# Altium PCB PCB1.PcbDoc
Units mm, origin at the board's own origin, x right, y up, seen from the top; angles counter-clockwise.
Board outline 93 x 70.5 mm, 2 copper layers (Top Layer, Bottom Layer); 18 components, 21 nets, 78 pads, 0 vias.
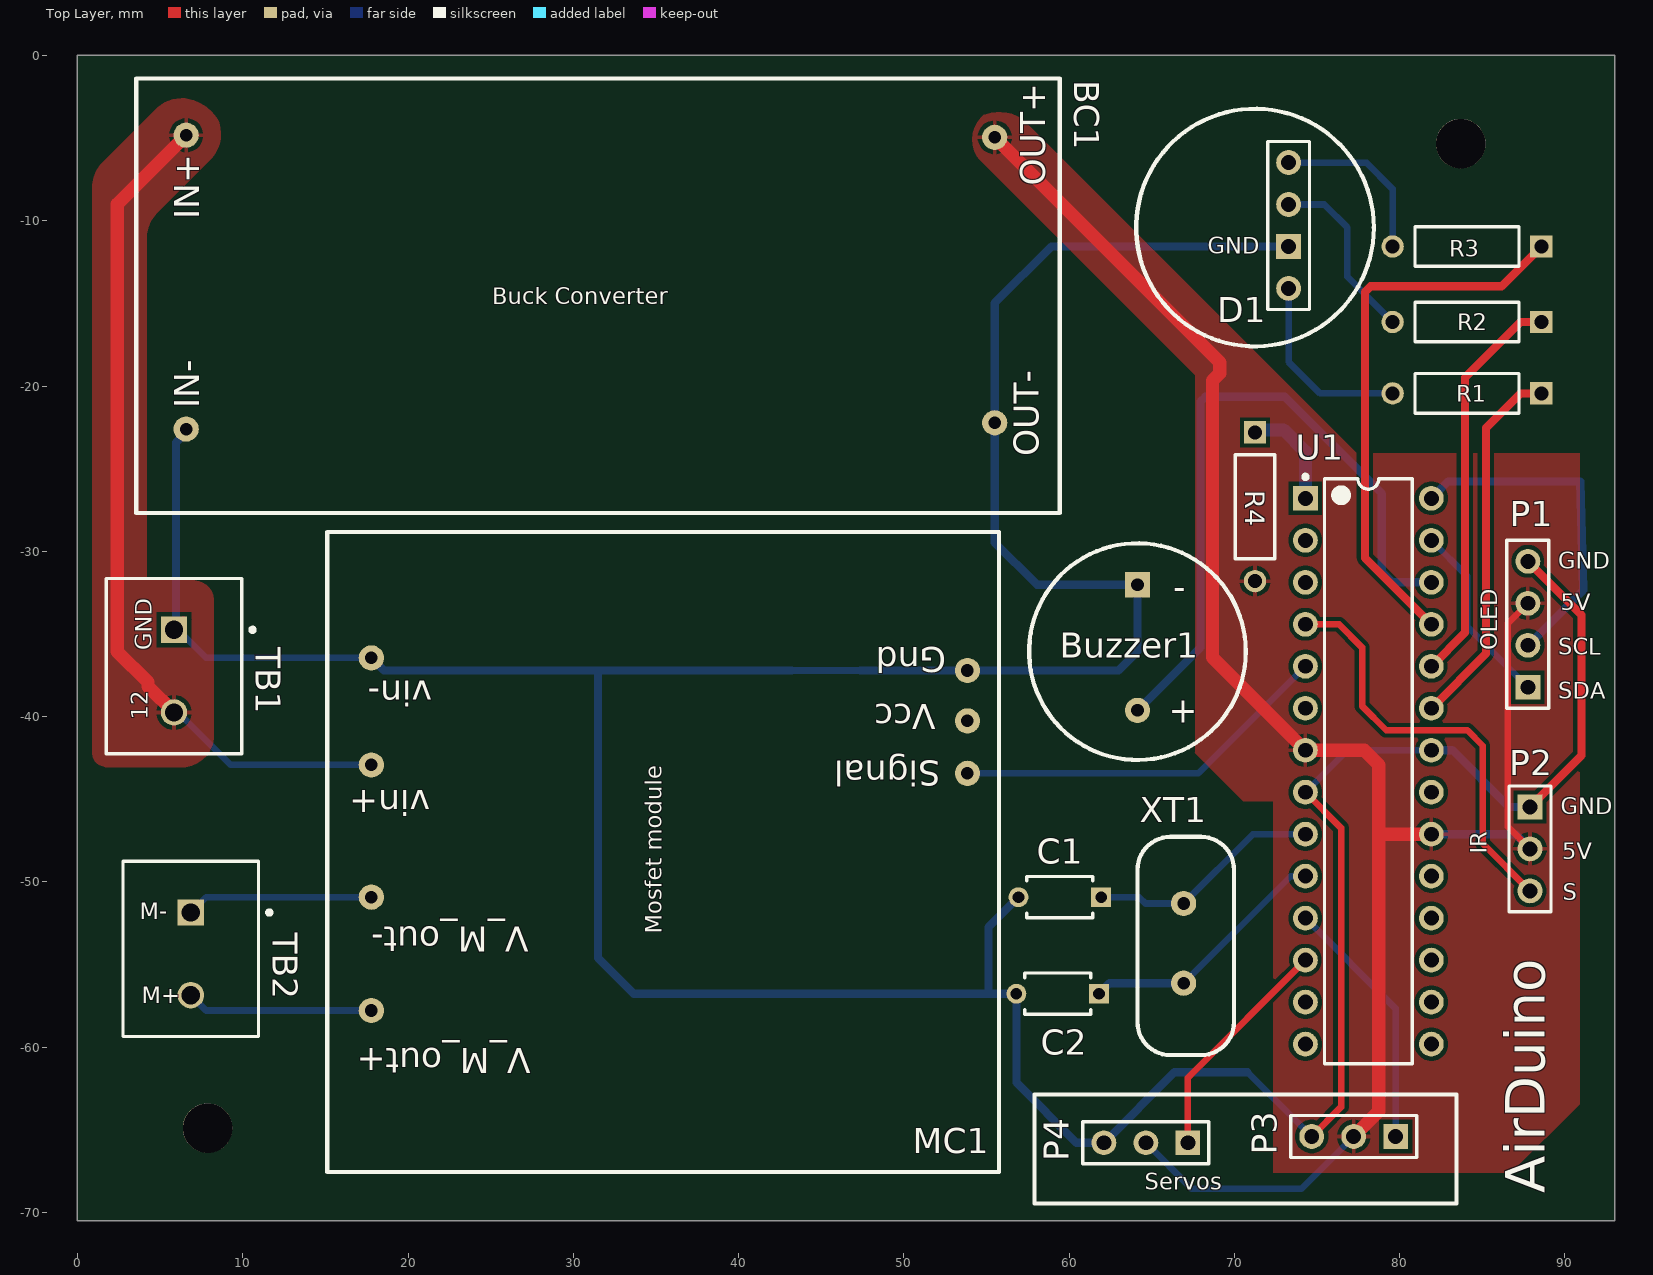
[diagram p0: Top Layer view]
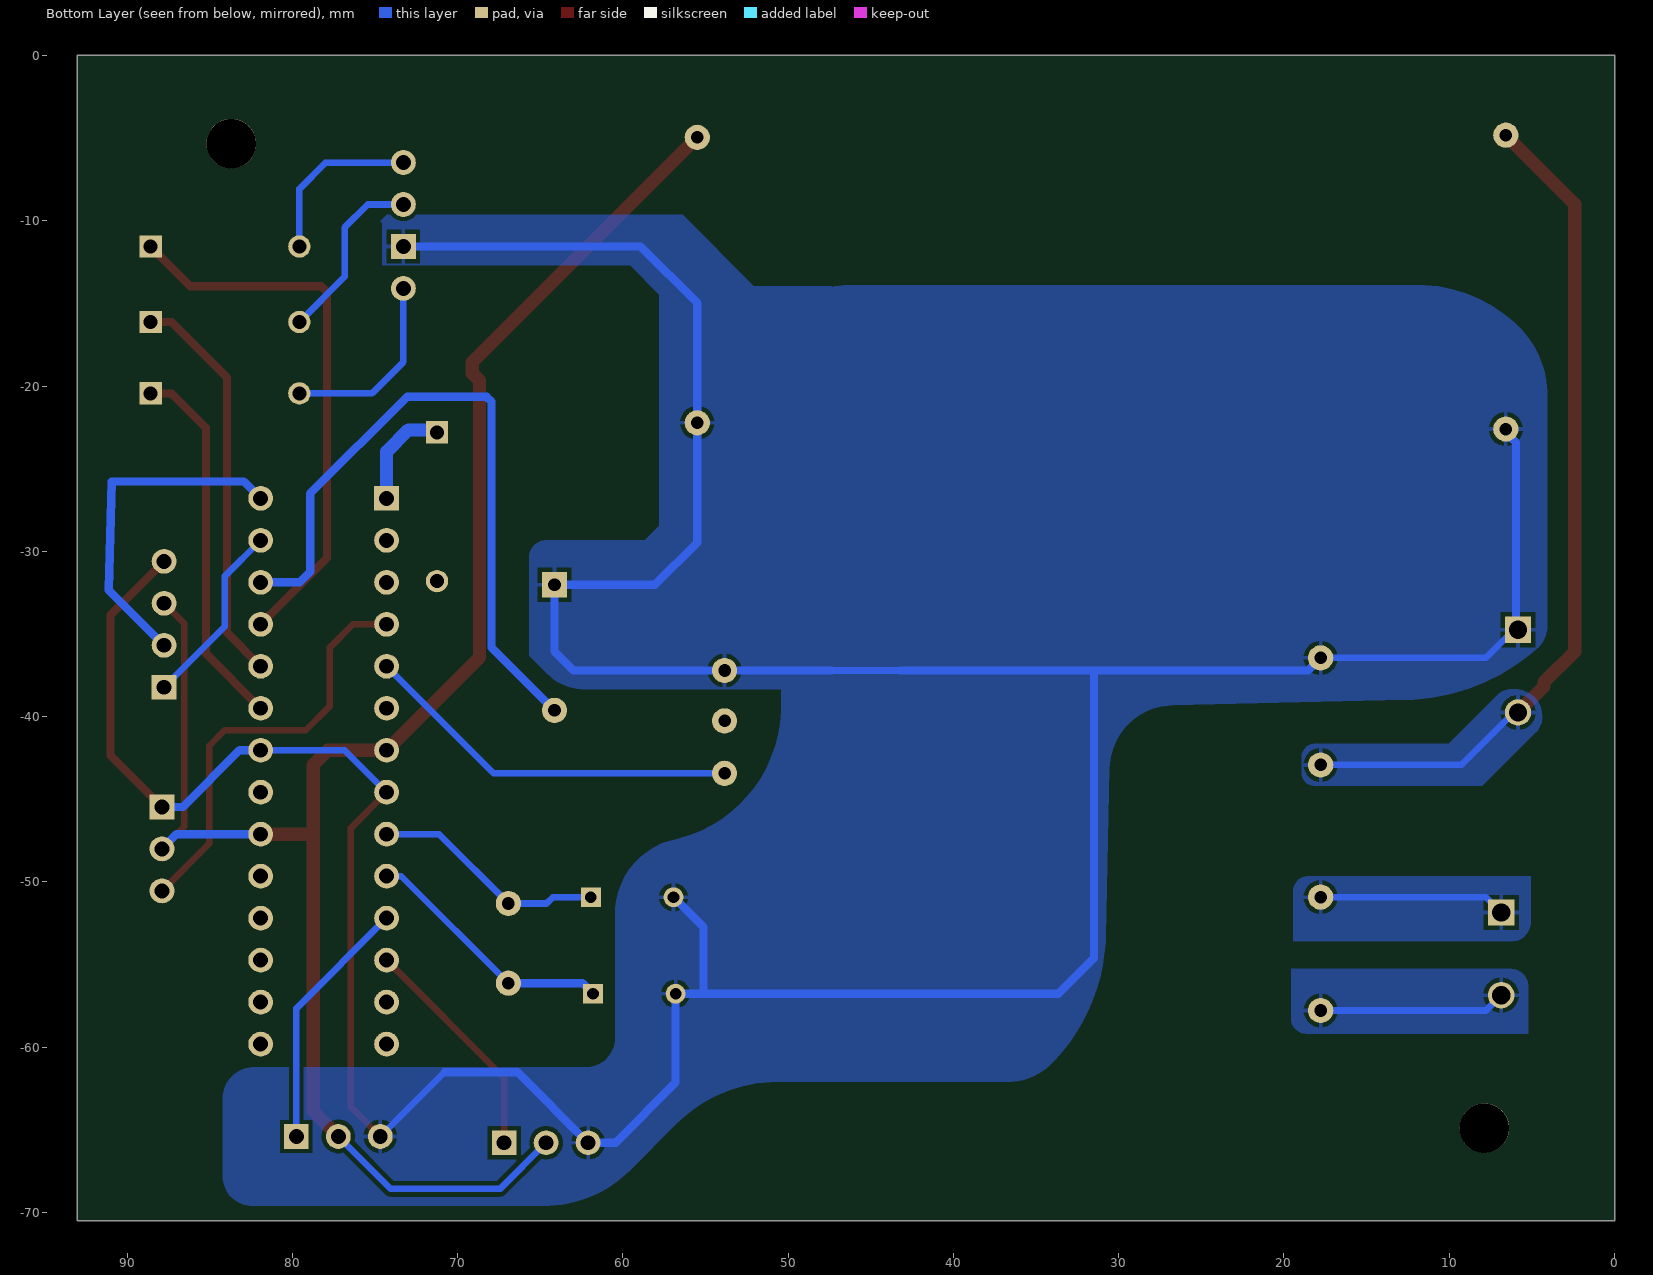
[diagram p1: Bottom Layer view, seen from below]
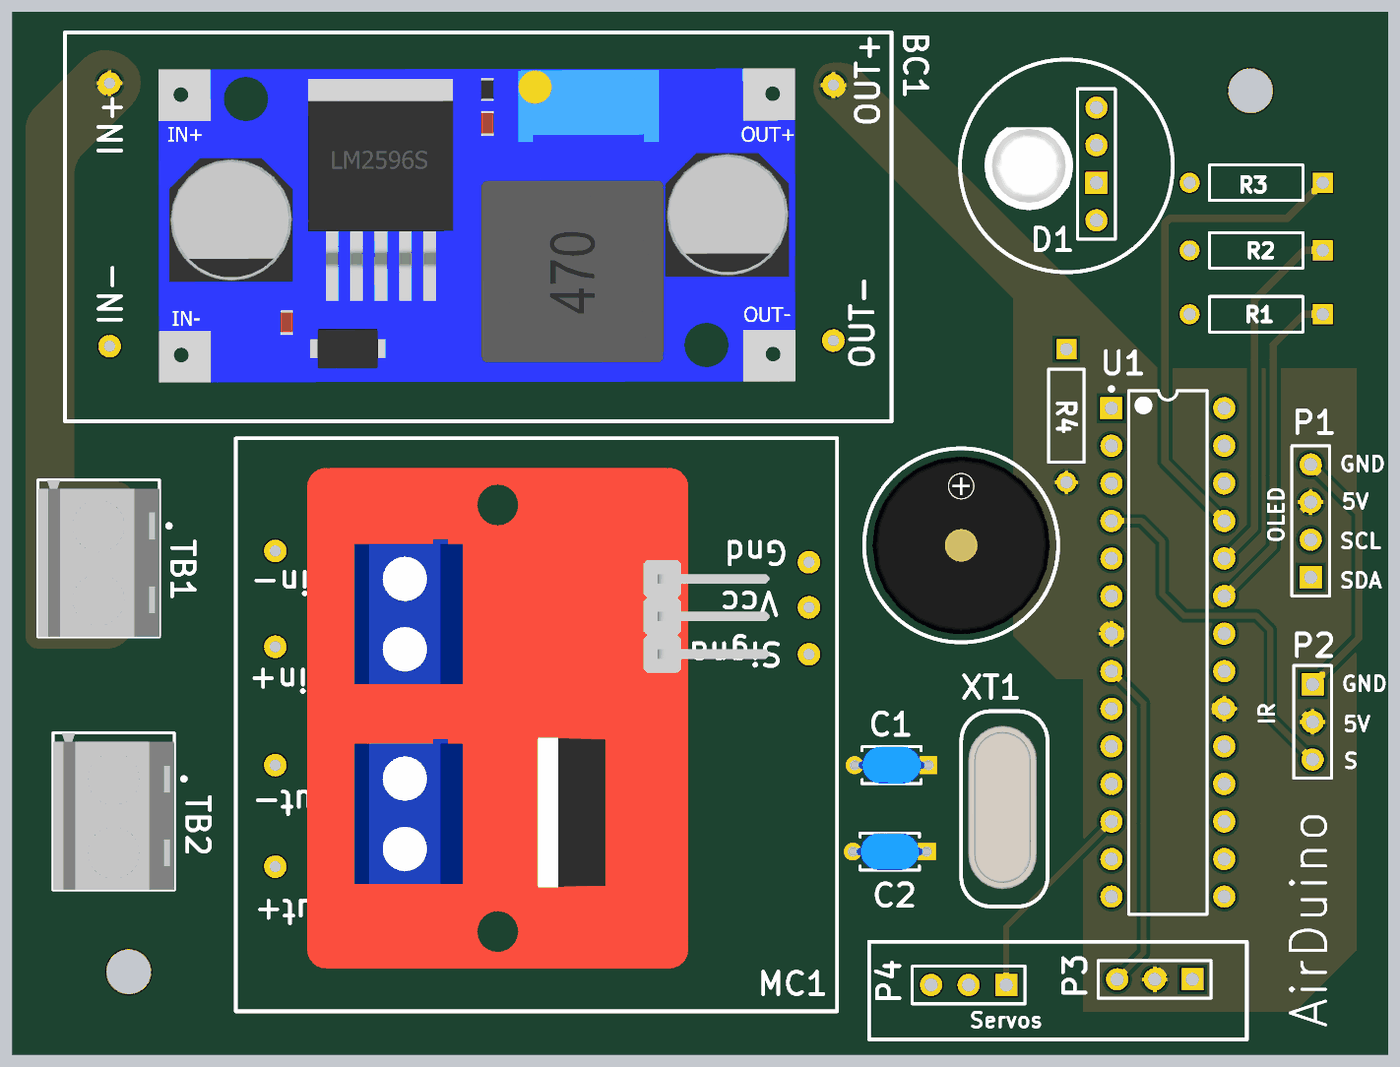
[diagram p2: 3D render of the assembled board from above, using the file's embedded part models]

## Layer stack, top to bottom
Top Solder: solder mask 0.0102, Solder Resist, Dk 3.5
Top Layer: signal copper 0.0356
Dielectric 1: dielectric 0.32, FR-4, Dk 4.8
Bottom Layer: signal copper 0.0356
Bottom Solder: solder mask 0.0102, Solder Resist, Dk 3.5

## Board outline
0,-70.5 93,-70.5 93,0 0,0

## Design rules (kind name [scope] priority, off if disabled: settings)
Clearance [All] p1: gap=0.254 ignorepadtopadclearanceinfootprint=FALSE except(0: Arc-Hole Track-Hole SMDPad-Hole THPad-Hole Via-Hole Fill-Hole Poly-Hole Region-Hole Text-Hole)
HoleSize [All] p1: absolutevalues=TRUE maxlimit=4 minlimit=0.4 maxpercent=80.000 minpercent=20.000
HoleToHoleClearance [All] p1: gap=0.3 allowstackedmicrovias=TRUE
PolygonConnect [All] p1: connectstyle=Relief reliefconductorwidth=0.254 reliefentries=4 polygonreliefangle="90 Angle" airgapwidth=0.254
RoutingVias [All] p1: holewidth=0.711 width=1.27 viastyle="Through Hole" minholewidth=0.711 minwidth=1.27 maxholewidth=0.711 maxwidth=1.27
SolderMaskExpansion [All] p1: expansion=0.102 istentingtop=FALSE
Width OtherWidths [All] p1: maxlimit=1.27 minlimit=0.254 preferedwidth=0.5
Width PowerNets [(InNet('5V') OR InNet('GND') OR InNet('12V'))] p2: maxlimit=0.762 minlimit=0.254 preferedwidth=0.6
Width [All] p3: maxlimit=0.254 minlimit=0.254 preferedwidth=0.254
28 further rules are at their usual default settings.

## Components (designator, comment, footprint, x,y, rotation, side; value= is the part's Value field where it differs from the comment)
BC1 "BuckConverter 5V" BUCK 27.686,-15.367 r0 top
Buzzer1 "Buzzer" BUZZER 64.135,-39.624 r0 top
C1 "22pF" FP-RDE0M1-MFG 59.436,-50.927 r180 top
C2 "22pF" FP-RDE0M1-MFG 59.309,-56.769 r180 top
D1 "check foot print and real model" RGB_LED 67.437,-10.922 r180 top
MC1 "MosfetModule" MOSFETMOTERDRIVER 49.657,-33.782 r180 top
P1 "OLED" HDR1X4 87.757,-38.227 r90 top
P2 "IR_Reciever" HDR1X3 87.884,-45.466 r270 top
P3 "Servo1" HDR1X3 79.756,-65.405 r180 top
P4 "Servo2" HDR1X3 67.183,-65.786 r180 top
R1 "MFR-25FBF52-1K" RESA60-630X240 84.074,-20.447 r180 top
R2 "MFR-25FBF52-1K" RESA60-630X240 84.074,-16.129 r180 top
R3 "MFR-25FBF52-1K" RESA60-630X240 84.074,-11.557 r180 top
R4 "10K" RESA60-630X240 71.247,-27.305 r270 top
TB1 "DC 12 IN" "TERMINAL BLOCK" 5.842,-37.251 r270 top
TB2 "Motor" "TERMINAL BLOCK" 6.858,-54.356 r270 top
U1 "ATmega328-PU" 28P3 78.105,-43.307 r0 top
XT1 "Crystal Oscillator" CRYSTALOSCILLATOR 67.31,-51.562 r90 top

## Footprints (in the part's own frame and the unit in brackets; to place one, negate y for a bottom-side part, rotate by r counter-clockwise, add the part's x,y. Pads: shape width x height; smd on the part's side, far side on the other; paste and mask are expansions set on the pad)
28P3 [mm] "28-Pin Plastic Dual In-Line Package (PDIP)"
  rect 1.5x1.5 hole 0.9: 1(-3.81,16.51)
  round 1.5 hole 0.9: 2(-3.81,13.97) 3(-3.81,11.43) 4(-3.81,8.89) 5(-3.81,6.35) 6(-3.81,3.81) 7(-3.81,1.27) 8(-3.81,-1.27) 9(-3.81,-3.81) 10(-3.81,-6.35) 11(-3.81,-8.89) 12(-3.81,-11.43) 13(-3.81,-13.97) 14(-3.81,-16.51) 15(3.81,-16.51) 16(3.81,-13.97) 17(3.81,-11.43) 18(3.81,-8.89) 19(3.81,-6.35) 20(3.81,-3.81) 21(3.81,-1.27) 22(3.81,1.27) 23(3.81,3.81) 24(3.81,6.35) 25(3.81,8.89) 26(3.81,11.43) 27(3.81,13.97) 28(3.81,16.51)
  silkscreen extent -3.93,-17.7 2.65,17.93, body extent -3.6,-17.65 3.6,17.65, height 4.58
BUCK [mil]
  round 60 hole 30: 0(-830.98,415) 1(-830.98,-285) 2(1095,410) 3(1095,-270)
  silkscreen extent -950,-485 1250,550, body extent -701,-381 994,454, height 513
BUZZER [mil]
  round 60 hole 30: 0(0,0)
  rect 60x60 hole 30: 1(0,299.21)
  silkscreen extent -258,-118 258,398, body extent -236,-96 236,376, height 374
CRYSTALOSCILLATOR [mil]
  round 60 hole 30: 0(-180,15) 1(10,15)
  silkscreen extent -351,-105 169,125, body extent -305,-77 130,107, height 138
FP-RDE0M1-MFG [mm]
  rect 1.2x1.2 hole 0.7 paste-1000 mask+0: 1(-2.5,0)
  round 1.2 hole 0.7 paste-1000 mask+0: 2(2.5,0)
  silkscreen extent -2,-1.25 2,1.25, body extent -3.2,-1.35 3.2,1.35, height 0.25
HDR1X3 [mm] "Connector; Header; 3 Position"
  rect 1.5x1.5 hole 0.9: 1(0,0)
  round 1.5 hole 0.9: 2(2.54,0) 3(5.08,0)
  silkscreen extent -1.27,-1.27 6.35,1.27
HDR1X4 [mm] "Connector; Header; 4 Position"
  rect 1.5x1.5 hole 0.9: 1(0,0)
  round 1.5 hole 0.9: 2(2.54,0) 3(5.08,0) 4(7.62,0)
  silkscreen extent -1.27,-1.27 8.89,1.27
MOSFETMOTERDRIVER [mil]
  round 60 hole 30: 4(1255,945) 5(1255,675) 6(1255,360) 7(1255,105) 8(-165,380) 9(-165,135) 10(-165,255)
  silkscreen extent -240,-195 1360,1330, body extent -60,-116 1170,1216, height 972
RESA60-630X240 [mm] "Axial Resistor, 2-Leads, Dia 2.4mm, Body Length 6.3mm"
  rect 1.35x1.35 hole 0.85: 1(-4.5,0)
  round 1.35 hole 0.85: 2(4.5,0)
  silkscreen extent -3.15,-1.2 3.15,1.2, body extent -3.15,-1.2 3.15,1.2, height 2.4
RGB_LED [mm]
  rect 1.5x1.5 hole 0.9: 0(-5.842,0.635)
  round 1.5 hole 0.9: 1(-5.842,3.175) 2(-5.842,-1.905) 3(-5.842,-4.445)
  silkscreen extent -11,-7.7 3.38,6.68, body extent -4.27,-3.11 1.73,2.49, height 7.99
"TERMINAL BLOCK" [mm] "Female Header, Pitch 5mm, 1 x 2 Position, Height 10mm"
  rect 1.6x1.6 hole 1.1: 1(-2.5,0)
  round 1.6 hole 1.1: 2(2.5,0)
  silkscreen extent -5.6,-4.1 5,4.88, body extent -5.6,-4.1 5,4.1, height 10

## Part data
BC1: library part BuckConverter
C1 C2: library part CMP-06035-051680-1, "Ceramic Capacitor 100nF ±10% 50V X7R Radial", Capacitance=100nF, Case/Package=Radial, Dielectric=X7R, Max Operating Temperature=125°C, Min Operating Temperature=-55°C, Package Quantity=2000, Resistor Type=Ceramic, Tolerance=10%, Voltage Rating=50V, Height=3.5mm, Height - Seated (Max)=0.236inch, Lead Diameter=0.5mm, Lead Free="Lead Free", Lead Pitch=0.197inch, Lead/Base Style=Kinked, Length=0.157inch, Mount="Through Hole", Packaging="Tape and Reel", Termination=Radial, Voltage Rating (DC)=50V, Width=3.5mm
D1: library part RGB_LED
P1: library part "Header 4", "Header, 4-Pin", LatestRevisionDate=17-Jul-2002, LatestRevisionNote="Re-released for DXP Platform.", Publisher="Altium Limited"
P2 P3 P4: library part "Header 3", "Header, 3-Pin", LatestRevisionDate=17-Jul-2002, LatestRevisionNote="Re-released for DXP Platform.", Publisher="Altium Limited"
R1 R2 R3 R4: library part CMP-1659-00075-1, "Axial Resistor, 1 KOhm, +/- 1%, 250 mW, -55 to 155 degC, 2-Pin THD, RoHS, Bulk", Case\Package=Axial, Max Operating Temperature="155 degC", Min Operating Temperature="-55 degC", Package Quantity=200, Power Rating="250 mW", Resistance="10 kohm", Tolerance=1%, Voltage Rating="250 V", ComponentLink1Description="Manufacturer URL", ComponentLink1URL=http://www.yageo.com/, ComponentLink2Description=Datasheet, ComponentLink2URL=http://www.yageo.com/documents/recent/Yageo%20LR_MFR_2013.pdf, DatasheetVersion=Apr-13, Length="0.248 inch", PackageDescription="2-Pin Axial Lead, Dia 2.4 mm, Body Length 6.3 mm", PackageReference=MFR-25, Packaging=Bulk, RoHSCompliant=true
TB1 TB2: library part "Terminal Block"
U1: library part CMP-0095-00015-2, "8-bit AVR Microcontroller, 32KB Flash, 1KB EEPROM, 2KB SRAM, 28-pin PDIP, Industrial Grade (-40°C to 85°C)", ComponentLink1Description="Manufacturer URL", ComponentLink1URL=http://www.atmel.com/, ComponentLink2Description="ATmega48A/48PA/88A/88PA/168A/168PA/328/328P Datasheet", ComponentLink2URL=http://www.atmel.com/dyn/resources/prod_documents/8271.pdf, ComponentLink3Description="ATmega48A/48PA/88A/88PA/168A/168PA/328/328P Summary", ComponentLink3URL=http://www.atmel.com/dyn/resources/prod_documents/8271S.pdf, DatasheetVersion="revD, May-2011", PackageDescription="28-lead (0.300\"/7.62mm Wide) Plastic Dual Inline Package (PDIP)", PackageReference=28P3, PackageVersion="revB, Sep-2001", RevisionNote="DatasheetVersion updated. URLs added."

## Free pads (board coordinates)
  round 3 hole 3: 2(7.874,-64.897) 2(83.693,-5.334)

## Nets (pads, with @x,y where several pads share a name; then routed paths per layer and width w, separated by ;. In a path a pad name is that pad's centre, name@x,y a point inside that pad or via, vN(x,y) a via of type N, cw(c..) or ccw(c..) an arc to the next point about the centre after c; other vN are vias at no path point)
5V: BC1.2 P1.3 P2.2 P3.2 P4.2 R4.2 U1.7 U1.20 | length 113.7
  Top Layer w0.4: P1.3 86.538,-34.366 86.538,-46.66 P2.2
  Top Layer w0.8: BC1.2 69.116,-18.57 69.116,-19.232 68.673,-19.675 68.673,-36.415 U1.7 77.851,-42.037 78.74,-42.926 78.74,-46.99 ; P3.2 78.74,-63.881 78.74,-46.99 ; U1.20 78.867,-47.117 78.74,-46.99
  Bottom Layer w0.4: P4.2 67.437,-68.58 74.041,-68.58 P3.2
  Bottom Layer w0.5: U1.20 86.995,-47.117 P2.2
12V: BC1.0 MC1.6 TB1.2 | length 51.3
  Top Layer w0.8: TB1.2 4.272,-38.181 4.272,-37.927 2.413,-36.068 2.413,-8.992 BC1.0
  Bottom Layer w0.4: TB1.2 6.096,-39.751 9.271,-42.926 MC1.6
GND: BC1.1 BC1.3 Buzzer1.1 C1.2 C2.2 D1.0 MC1.7 MC1.9 P1.4 P2.1 P3.3 P4.3 TB1.1 U1.8 U1.22 | length 254.8
  Top Layer w0.4: TB1.1 TB1.1@6.442,-34.151 ; U1.8 76.454,-46.736 76.454,-63.627 P3.3
  Top Layer w0.5: P1.4 91,-33.85 91,-42.35 P2.1
  Bottom Layer w0.4: TB1.1@5.969,-34.624 7.794,-36.449 MC1.7 ; 43.22,-37.211 47.371,-37.211 ; 70.79,-61.519 P3.3 ; U1.8 76.835,-42.037 U1.22
  Bottom Layer w0.5: TB1.1 5.969,-34.624 5.969,-23.411 6.579,-22.801 BC1.1 ; MC1.7 18.542,-37.211 31.496,-37.211 ; 43.22,-37.211 31.496,-37.211 ; 47.371,-37.211 MC1.9 62.992,-37.211 64.135,-36.068 Buzzer1.1 58.059,-32.024 55.499,-29.464 BC1.3 55.499,-14.986 58.928,-11.557 D1.0 ; C1.2 55.118,-52.745 55.118,-56.769 ; 70.79,-61.519 66.37,-61.519 P4.3 60.452,-65.786 56.809,-62.143 C2.2 55.118,-56.769 ; U1.22 83.185,-42.037 86.614,-45.466 P2.1 ; 31.496,-37.211 31.496,-54.61 33.655,-56.769 55.118,-56.769
IR_signal: P2.3 U1.4 | length 25.8
  Top Layer w0.4: U1.4 76.327,-34.417 77.724,-35.814 77.724,-39.37 79.187,-40.833 84.097,-40.833 85.027,-41.763 85.027,-47.689 P2.3
Motor: MC1.8 U1.5 | length 23.1
  Bottom Layer w0.4: MC1.8 67.818,-43.434 U1.5
NetBuzzer1_0: Buzzer1.0 U1.26 | length 41.8
  Bottom Layer w0.5: Buzzer1.0 67.945,-35.814 67.945,-20.943 68.238,-20.65 73.05,-20.65 78.918,-26.518 78.918,-31.242 79.553,-31.877 U1.26
NetC1_1: C1.1 U1.9 XT1.1 | length 14.3
  Bottom Layer w0.4: C1.1 64.237,-50.927 64.618,-51.308 XT1.1 71.12,-47.117 U1.9
NetC2_1: C2.1 U1.10 XT1.0 | length 15.4
  Bottom Layer w0.4: XT1.0 73.406,-49.657 U1.10
  Bottom Layer w0.5: C2.1 62.444,-56.134 XT1.0
NetD1_1: D1.1 R1.2 | length 11.5
  Bottom Layer w0.4: D1.1 73.279,-18.542 75.184,-20.447 R1.2
NetD1_2: D1.2 R2.2 | length 11
  Bottom Layer w0.4: D1.2 75.438,-9.017 76.835,-10.414 76.835,-13.39 R2.2
NetD1_3: D1.3 R3.2 | length 10.4
  Bottom Layer w0.4: D1.3 73.29,-6.488 77.989,-6.488 79.574,-8.073 R3.2
NetMC1_4: MC1.4 TB2.2 | length 11.3
  Bottom Layer w0.4: TB2.2 7.787,-57.785 MC1.4
NetMC1_5: MC1.5 TB2.1 | length 11.3
  Bottom Layer w0.4: TB2.1 7.787,-50.927 MC1.5
NetR1_1: R1.1 U1.23 | length 22.6
  Top Layer w0.5: U1.23 85.217,-36.195 85.217,-22.529 87.299,-20.447 R1.1
NetR2_1: R2.1 U1.24 | length 24.3
  Top Layer w0.5: U1.24 83.947,-34.925 83.947,-19.481 87.299,-16.129 R2.1
NetR3_1: R3.1 U1.25 | length 33.6
  Top Layer w0.5: U1.25 77.898,-30.4 77.898,-14.304 78.232,-13.97 86.161,-13.97 R3.1
NetR4_1: R4.1 U1.1 | length 6.5
  Bottom Layer w0.8: R4.1 71.395,-22.657 72.974,-22.657 74.295,-23.978 U1.1
SCL: P1.2 U1.28 | length 20.7
  Bottom Layer w0.5: U1.28 82.931,-25.781 90.932,-25.781 91.108,-32.336 P1.2
SDA: P1.1 U1.27 | length 11.3
  Bottom Layer w0.4: U1.27 84.099,-31.521 84.099,-34.569 P1.1
Servo_1: P3.1 U1.11 | length 15.5
  Bottom Layer w0.4: U1.11 79.756,-57.658 P3.1
Servo_2: P4.1 U1.12 | length 14
  Top Layer w0.4: P4.1 67.183,-61.849 U1.12
pads on no net: MC1.10 U1.2 U1.3 U1.6 U1.13 U1.14 U1.15 U1.16 U1.17 U1.18 U1.19 U1.21

## Polygon pours and split planes (outlines as drawn)
GND on Bottom Layer "NONET_L-01_P-001" (solid, remove dead copper, pour order 0): 5.802,-16.423 ccw(c9.998,-20.619) 4.064,-20.619 4.064,-34.495 ccw(c5.933,-34.495) 4.707,-35.906 ccw(c12.947,-26.423) 12.648,-38.982 26.746,-39.317 cw(c26.653,-43.227) 30.562,-43.139 30.79,-53.249 ccw(c42.18,-52.992) 34.124,-61.048 ccw(c36.671,-58.501) 36.671,-62.103 50.633,-62.103 cw(c50.633,-70.784) 56.772,-64.646 59.56,-67.434 ccw(c64.779,-62.216) 64.779,-69.596 82.423,-69.596 ccw(c82.423,-67.818) 84.201,-67.818 84.201,-63.119 ccw(c82.296,-63.119) 82.296,-61.214 62.23,-61.214 cw(c62.23,-59.436) 60.452,-59.436 60.452,-51.878 ccw(c55.922,-51.878) 56.905,-47.456 cw(c58.702,-39.37) 50.419,-39.37 50.419,-17.907 ccw(c46.405,-17.907) 46.404,-13.892 11.911,-13.892 ccw(c11.911,-22.531)
GND on Bottom Layer "NONET_L-01_P-001" (solid, remove dead copper, pour order 9): 49.784,-38.354 62.326,-38.354 ccw(c62.326,-35.214) 64.547,-37.434 65.659,-36.322 65.659,-30.353 ccw(c64.643,-30.353) 64.643,-29.337 58.674,-29.337 57.785,-28.448 57.785,-14.478 59.563,-12.7 74.549,-12.7 74.549,-10.16 74.676,-10.033 74.295,-9.652 56.388,-9.652 52.07,-13.97 47.371,-13.97 47.371,-35.941 45.72,-37.592
12V on Bottom Layer "NONET_L-01_P-001" (solid, remove dead copper, pour order 8): 6.018,-38.354 6.3,-38.354 cw(c6.297,-39.401) 7.038,-38.661 10.033,-41.656 18.161,-41.656 cw(c18.161,-42.418) 18.923,-42.418 18.923,-43.434 cw(c18.161,-43.434) 18.161,-44.196 8.001,-44.196 4.796,-40.991 cw(c5.806,-39.981) 4.381,-39.892 cw(c6.018,-39.995)
NetMC1_4 on Bottom Layer "NONET_L-01_P-001" (solid, remove dead copper, pour order 5): 5.207,-59.178 5.207,-56.388 cw(c6.35,-56.388) 6.35,-55.245 19.558,-55.245 19.558,-58.293 cw(c18.67,-58.293) 18.67,-59.181
NetMC1_5 on Bottom Layer "NONET_L-01_P-001" (solid, remove dead copper, pour order 3): 5.08,-49.661 5.08,-52.451 ccw(c6.223,-52.451) 6.223,-53.594 19.431,-53.594 19.431,-50.546 ccw(c18.543,-50.546) 18.543,-49.658
5V on Top Layer "NONET_L-01_P-001" (solid, remove dead copper, pour order 12): 67.64,-18.593 67.64,-42.164 67.615,-42.189 70.536,-45.11 72.873,-45.11 72.873,-23.292 73.152,-23.012
5V on Top Layer "NONET_L-01_P-001" (solid, remove dead copper, pour order 11): 54.55,-6.289 72.365,-24.068 72.365,-67.615 86.716,-67.615 90.881,-63.449 90.881,-24.079 77.419,-24.079 57.222,-3.882 ccw(c55.763,-5.987) 54.829,-3.602 ccw(c56.128,-5.095)
12V on Top Layer "NONET_L-01_P-001" (solid, remove dead copper, pour order 1): 7.239,-2.794 cw(c6.223,-5.207) 8.506,-3.925 cw(c6.497,-4.771) 8.038,-6.313 4.804,-9.547 ccw(c6.285,-11.027) 4.191,-11.027 4.191,-31.75 6.985,-31.75 cw(c6.985,-33.02) 8.255,-33.02 8.255,-41.148 cw(c6.35,-41.148) 6.35,-43.053 1.778,-43.053 cw(c1.778,-42.164) 0.889,-42.164 0.889,-8.032 cw(c3.11,-8.032) 1.539,-6.462 4.774,-3.227 cw(c6.299,-4.752) 6.657,-2.625 cw(c6.223,-5.206)

## Silkscreen, mask and mechanical layers (free items; w line width, h text height)
Top Overlay:
  lines w0.254: 57.912,-69.469 83.439,-69.469 83.439,-62.865 57.912,-62.865 57.912,-69.469
  text "GND" at 68.399,-11.992 h1
  text "Buck Converter" at 25.092,-15.04 h1
  text "GND" at 89.608,-31.042 h1
  text "5V" at 89.735,-33.582 h1
  text "GND" at 4.499,-35.995 h1 r90
  text "OLED" at 85.906,-35.995 h1 r90
  text "SCL" at 89.608,-36.249 h1
  text "SDA" at 89.608,-38.916 h1
  text "12" at 4.245,-40.186 h1 r90
  text "GND" at 89.735,-45.901 h1
  text "IR" at 85.271,-48.314 h1 r90
  text "5V" at 89.83,-48.631 h1
  text "S" at 89.862,-51.108 h1
  text "M-" at 3.756,-52.251 h1
  text "Mosfet module" at 35.36,-53.14 h1 r90
  text "M+" at 3.883,-57.331 h1
  text "Servos" at 64.589,-68.634 h1
  text "AirDuino" at 88.776,-68.837 h2.4 r90

## Text inside footprints (layer, text, board x,y; h text height)
BC1: Top Overlay "OUT-" at 58.166,-24.257 h1.52 r90; Top Overlay "IN-" at 7.366,-21.336 h1.52 r90; Top Overlay "OUT+" at 58.547,-7.874 h1.52 r90; Top Overlay "IN+" at 7.366,-9.906 h1.52 r90
Buzzer1: Top Overlay "-" at 66.294,-32.893 h1.52; Top Overlay "+" at 66.04,-40.386 h1.52
MC1: Top Overlay "V_M_out-" at 27.305,-52.705 h1.52 r180; Top Overlay "vin+" at 21.336,-44.45 h1.52 r180; Top Overlay "vin-" at 21.463,-37.846 h1.52 r180; Top Overlay "V_M_out+" at 27.432,-60.071 h1.52 r180; Top Overlay "Signal" at 52.197,-42.672 h1.52 r180; Top Overlay "Gnd" at 52.578,-35.814 h1.52 r180; Top Overlay "Vcc" at 51.943,-39.243 h1.52 r180